# EAGLE board CHIRIMENBasicShield (EAGLE 7.5.0)
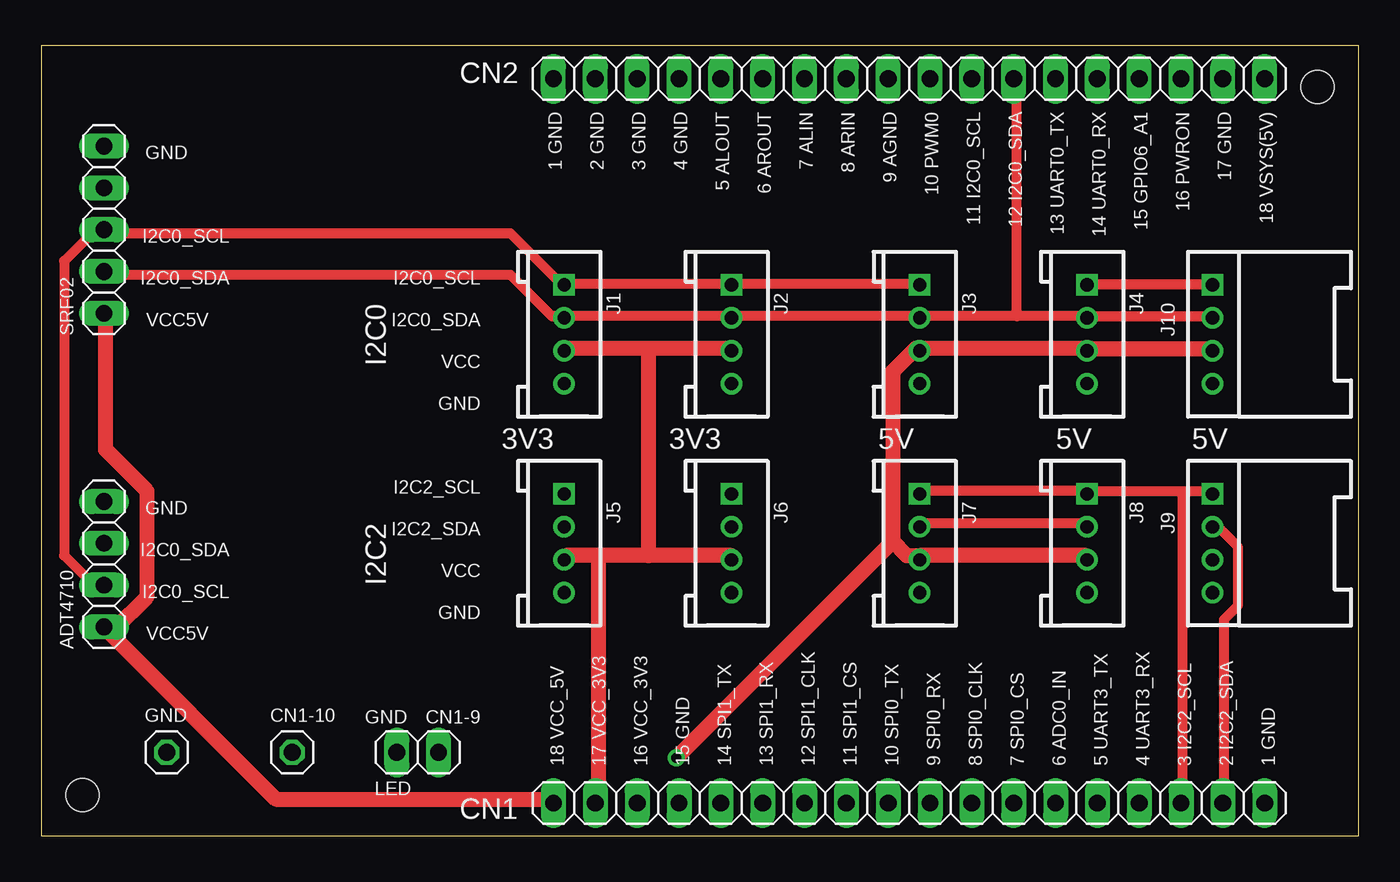
[diagram p0: board, top side]
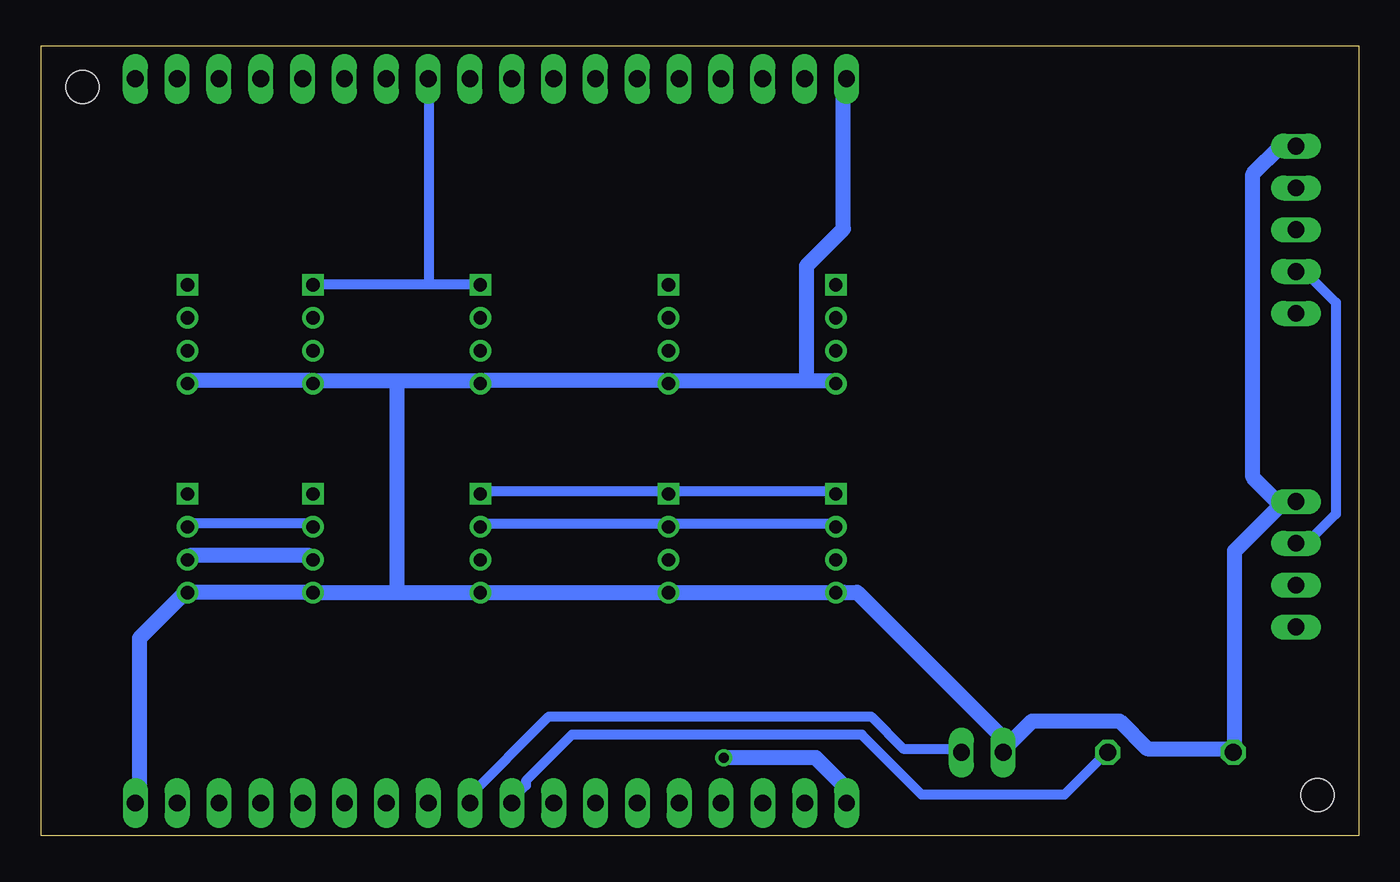
[diagram p1: board, bottom side, seen from below]

Size 80 x 48 mm. Coordinates in mm from the lower left corner, seen from the top.
Outline: 0,0 80,0 80,48 0,48 0,0
Copper layers (1*16): Top 0.035mm / dielectric 1.5mm / Bottom 0.035mm
Design rules "default": minimum track width 10mil, minimum drill 24mil, track to track 8mil, track to pad 8mil, pad to pad 8mil, via to via 8mil, smd to smd 8mil, copper to edge 40mil, drill to drill 8mil, minimum pad ring 10mil, minimum via ring 8mil, stop-mask expansion 4mil, vias tented up to drill 0mil, thermal gap 10mil
Net classes: 0 default: width 0.61 mm, clearance 0.508 mm; 1 Power: width 0.914 mm, clearance 0.508 mm
Holes 2 mm at 77.5,45.5 2.5,2.5

## Footprints (pad centres in the part's own frame; a part is rotated, then mirrored left to right if it is on the bottom)
1X04 = drill 1.016 long: 1 -3.81,0; 2 -1.27,0; 3 1.27,0; 4 3.81,0
1X18 = drill 1.016 long: 1 -21.59,0; 2 -19.05,0; 3 -16.51,0; 4 -13.97,0; 5 -11.43,0; 6 -8.89,0; 7 -6.35,0; 8 -3.81,0; 9 -1.27,0; 10 1.27,0; 11 3.81,0; 12 6.35,0; 13 8.89,0; 14 11.43,0; 15 13.97,0; 16 16.51,0; 17 19.05,0; 18 21.59,0
1X01 = drill 1.016 octagon: 1 0,0
HW4-2.0 = drill 0.8 pad 1.27 square: 1 -3,0 | drill 0.8 pad 1.27: 2 -1,0; 3 1,0; 4 3,0
HW4-2.0-90D = drill 0.8 pad 1.27 square: 1 -3,0 | drill 0.8 pad 1.27: 2 -1,0; 3 1,0; 4 3,0
1X02 = drill 1.016 long: 1 -1.27,0; 2 1.27,0
1X05 = drill 1.016 long: 1 -5.08,0; 2 -2.54,0; 3 0,0; 4 2.54,0; 5 5.08,0

## Placement (x,y rotation side)
ADT4710  [1X04]  3.81,16.51 90 top
CN1  [1X18]  52.7,2 180 top
CN1-10  [1X01]  15.24,5.08 0 top
CN2  [1X18]  52.7,46 0 top
GND  [1X01]  7.62,5.08 0 top
J1  4P-2.0  [HW4-2.0]  31.75,30.48 270 top
J2  4P-2.0  [HW4-2.0]  41.91,30.48 270 top
J3  4P-2.0  [HW4-2.0]  53.34,30.48 270 top
J4  4P-2.0  [HW4-2.0]  63.5,30.48 270 top
J5  4P-2.0  [HW4-2.0]  31.75,17.78 270 top
J6  4P-2.0  [HW4-2.0]  41.91,17.78 270 top
J7  4P-2.0  [HW4-2.0]  53.34,17.78 270 top
J8  4P-2.0  [HW4-2.0]  63.5,17.78 270 top
J9  4P-2.0-90D  [HW4-2.0-90D]  71.12,17.78 270 top
J10  4P-2.0-90D  [HW4-2.0-90D]  71.12,30.48 270 top
LED  [1X02]  22.86,5.08 0 top
SRF02  [1X05]  3.81,36.83 90 top

## Library data of the parts
ADT4710 CN1 CN1-10 CN2 GND LED SRF02 = pinhead
J1-J8 = Seeed-Connector -2016
J9 J10 = Seeed-OPL-Connector

## Nets
3V3 [Power]: CN1.17 J1.3 J2.3 J5.3 J6.3
5V [Power]: ADT4710.1 CN1.18 J3.3 J4.3 J7.3 J8.3 J9.3 J10.3 SRF02.1
GND [Power]: ADT4710.4 CN1.1 CN2.1 GND.1 J1.4 J2.4 J3.4 J4.4 J5.4 J6.4 J7.4 J8.4 J9.4 J10.4 LED.1 SRF02.5
N$1: CN1-10.1 CN1.10
N$2: CN1.2 J5.2 J6.2 J7.2 J8.2 J9.2
N$3: CN1.3 J5.1 J6.1 J7.1 J8.1 J9.1
N$6: ADT4710.3 CN2.12 J1.2 J2.2 J3.2 J4.2 J10.2 SRF02.2
N$7: ADT4710.2 CN2.11 J1.1 J2.1 J3.1 J4.1 J10.1 SRF02.3
N$9: CN1.9 LED.2

## Tracks (layer width: path | path; a pad name or v marks a point on that pad's centre or on a via)
3V3
  Top 0.914: 36.88,29.62 41.91,29.62 J2.3 | 36.88,29.62 31.85,29.62 J1.3 | 36.88,17.04 41.91,17.04 J6.3 | 36.88,17.04 33.81,17.04 | 33.81,17.04 31.85,17.04 J5.3 | 33.81,17.04 33.81,2.23 CN1.17 | 36.88,17.04 36.88,29.62
5V  (via drill 0.61)
  Top 0.914: J8.3 63.42,17.04 53.37,17.04 J7.3 53.09,17.04 52.53,17.04 51.69,17.88 | J10.3 70.97,29.62 63.7,29.62 J4.3 63.42,29.62 53.37,29.62 J3.3 53.09,29.62 51.69,28.22 51.69,17.88 | CN1.18 31.01,2.23 14.25,2.23 3.91,12.57 ADT4710.1 4.47,12.57 6.43,14.53 6.43,20.95 3.91,23.47 3.91,31.57 SRF02.1 | v38.56,4.75 51.69,17.88
  Bottom 0.914: J9.3 70.97,17.04 63.7,17.04 J8.3 | v38.56,4.75 32.97,4.75 31.29,3.07 31.29,2.23 CN1.18
GND
  Bottom 0.914: 58.4,27.66 63.42,27.66 J4.4 63.7,27.66 70.97,27.66 J10.4 | 58.4,27.66 53.37,27.66 J3.4 53.09,27.66 42.19,27.66 J2.4 41.91,27.66 33.53,27.66 | 33.53,27.66 31.85,27.66 J1.4 | 33.53,27.66 33.53,34.65 31.29,36.88 31.29,45.82 CN2.1 | SRF02.5 4.75,41.91 6.43,40.23 6.43,21.79 5.03,20.4 ADT4710.4 3.91,20.12 4.75,20.12 7.54,17.32 7.54,5.59 GND.1 7.82,5.31 12.85,5.31 14.53,6.99 19.84,6.99 21.51,5.31 LED.1 21.51,5.87 30.45,14.81 31.29,14.81 J5.4 31.85,14.81 41.91,14.81 J6.4 42.19,14.81 53.09,14.81 J7.4 53.37,14.81 58.4,14.81 | 58.4,14.81 63.42,14.81 J8.4 63.98,14.81 70.97,14.81 J9.4 71.53,14.53 74.04,12.01 74.04,2.23 CN1.1 | 58.4,14.81 58.4,27.66
N$1
  Bottom 0.61: CN1.10 51.41,2.23 50.57,3.07 50.57,3.35 47.78,6.15 30.18,6.15 26.54,2.52 17.88,2.52 15.37,5.03 CN1-10.1
N$2
  Top 0.61: J7.2 53.37,19 63.42,19 J8.2 | CN1.2 71.81,2.23 71.81,13.13 72.64,13.97 72.64,17.6 71.25,19 J9.2
  Bottom 0.61: J5.2 31.85,19 41.91,19 J6.2 42.19,19 53.09,19 J7.2 | J9.2 70.97,19 63.7,19 J8.2
N$3
  Top 0.61: J7.1 53.37,20.95 63.42,20.95 J8.1 63.7,20.95 69.29,20.95 | 69.29,20.95 70.97,20.95 J9.1 | 69.29,20.95 69.29,2.23 CN1.3
  Bottom 0.61: J5.1 31.85,20.95 41.91,20.95 J6.1 42.19,20.95 53.09,20.95 J7.1
N$6
  Top 0.61: 59.23,31.57 63.42,31.57 J4.2 63.7,31.57 70.97,31.57 J10.2 | 59.23,31.57 53.37,31.57 J3.2 53.09,31.57 42.19,31.57 J2.2 41.91,31.57 31.85,31.57 J1.2 31.57,31.57 31.01,31.57 28.5,34.09 3.91,34.09 SRF02.2 | 59.23,31.57 59.23,45.82 CN2.12
  Bottom 0.61: ADT4710.3 3.63,17.88 3.07,17.88 1.4,19.56 1.4,32.41 3.07,34.09 3.63,34.09 SRF02.2
N$7
  Top 0.61: ADT4710.2 3.63,15.37 3.07,15.37 1.4,17.04 1.4,34.92 3.07,36.6 3.63,36.6 SRF02.3 3.91,36.6 28.5,36.6 31.57,33.53 J1.1 31.85,33.53 41.91,33.53 J2.1 42.19,33.53 53.09,33.53 J3.1 | J10.1 70.97,33.53 63.7,33.53 J4.1
  Bottom 0.61: 56.44,33.53 63.42,33.53 J4.1 | 56.44,33.53 53.37,33.53 J3.1 | 56.44,33.53 56.44,45.82 CN2.11
N$9
  Bottom 0.61: LED.2 24.31,5.31 27.66,5.31 29.62,7.26 49.17,7.26 54.2,2.23 CN1.9

## Text on the board
tNames: 1 GND | 2 GND | 3 GND | 4 GND | 5 ALOUT | 6 AROUT | 7 ALIN | 8 ARIN | 9 AGND | 10 PWM0 | 11 I2C0_SCL | 12 I2C0_SDA | 13 UART0_TX | 14 UART0_RX | 15 GPIO6_A1 | 16 PWRON | 17 GND | 18 VSYS(5V) | GND | I2C0_SCL | I2C0_SDA | I2C0_SCL | VCC5V | I2C0_SDA | I2C0 | VCC | GND | 3V3 | 3V3 | 5V | 5V | 5V | I2C2_SCL | GND | I2C2_SDA | I2C0_SDA | VCC | I2C0_SCL | I2C2 | GND | VCC5V | GND | CN1-9 | 18 VCC_5V | 17 VCC_3V3 | 16 VCC_3V3 | 15 GND | 14 SPI1_TX | 13 SPI1_RX | 12 SPI1_CLK | 11 SPI1_CS | 10 SPI0_TX | 9 SPI0_RX | 8 SPI0_CLK | 7 SPI0_CS | 6 ADC0_IN | 5 UART3_TX | 4 UART3_RX | 3 I2C2_SCL | 2 I2C2_SDA | 1 GND